# EAGLE board knxhome-lqfp32-v2 (EAGLE 9.4.0)
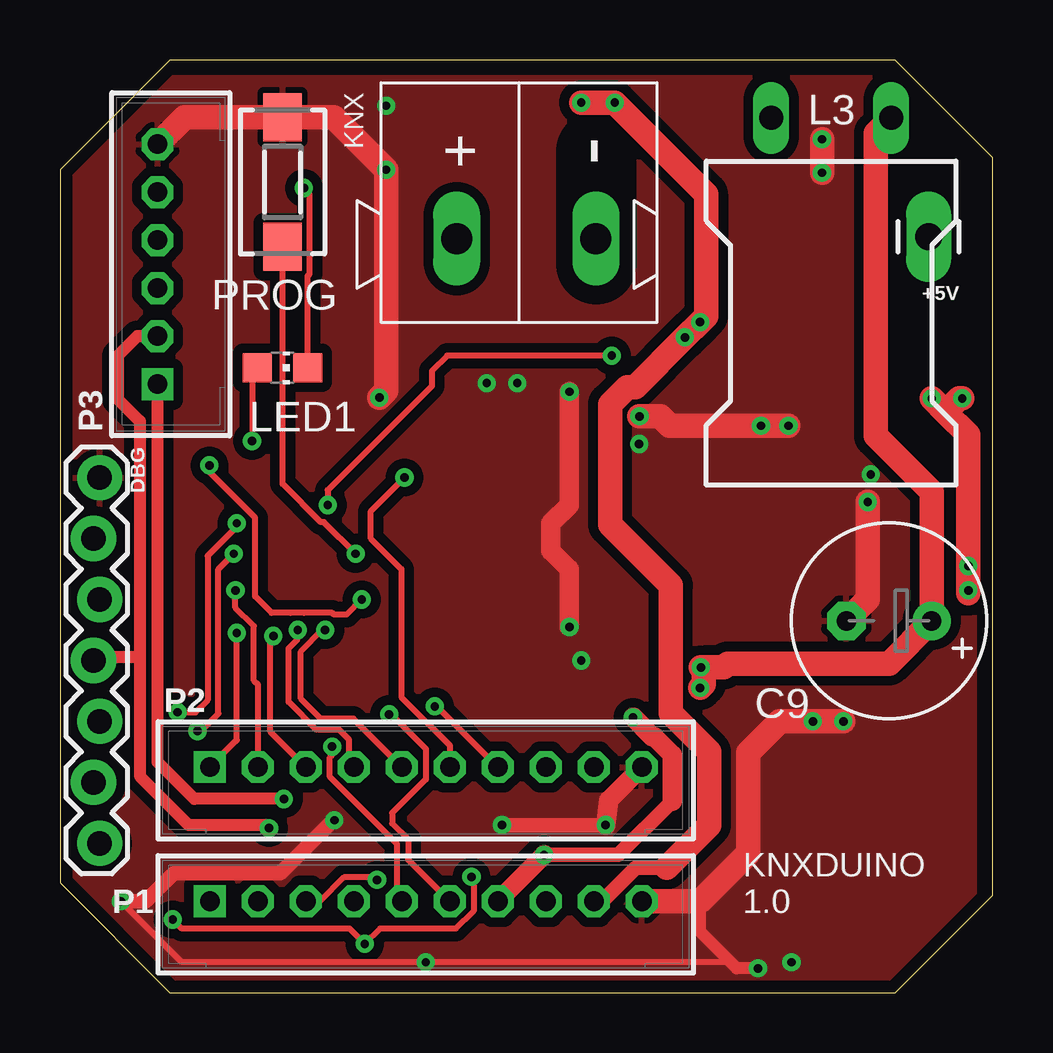
[diagram p0: board, top side]
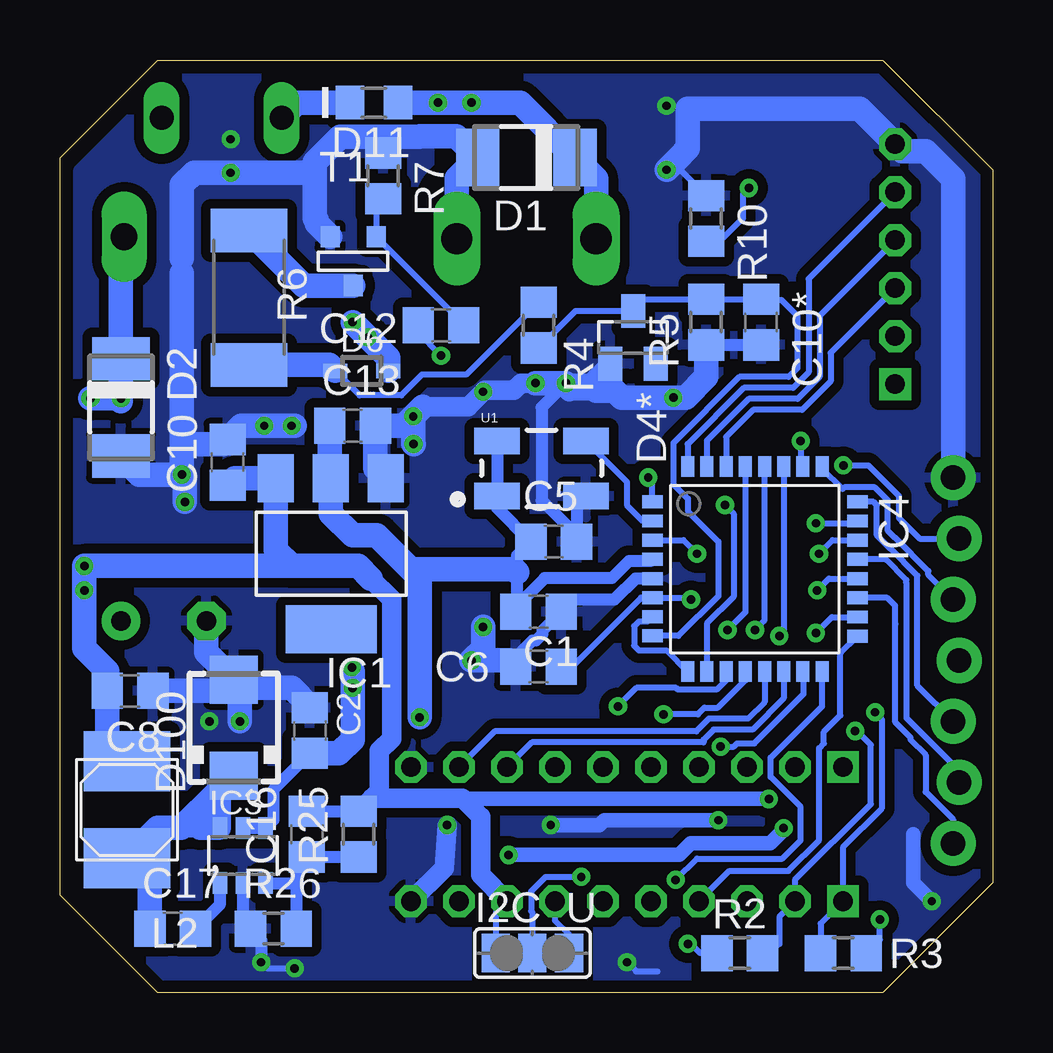
[diagram p1: board, bottom side, seen from below]

Size 38.86 x 38.86 mm. Coordinates in mm from the lower left corner, seen from the top.
Outline: 38.86,4.06 38.86,34.8 34.8,38.86 4.57,38.86 0,34.29 0,4.57 4.57,0 34.8,0 38.86,4.06
Copper layers (1*16): Top 0.035mm / dielectric 1.5mm / Bottom 0.035mm
Design rules "default *": minimum track width 8mil, minimum drill 0.35mm, track to track 8mil, track to pad 8mil, pad to pad 6mil, via to via 8mil, smd to smd 6mil, copper to edge 20mil, drill to drill 6mil, minimum pad ring 10mil, minimum via ring 8mil, stop-mask expansion 4mil, vias tented up to drill 40mil, thermal gap 10mil
Net classes: 1 power: width 0.305 mm
tRestrict: 1 lines
bRestrict: 3 lines

## Footprints (pad centres in the part's own frame; a part is rotated, then mirrored left to right if it is on the bottom)
1X01_LONGPAD = drill 1.118 pad 1.88 long: 1 0,0
C0805 = smd 1.3 x 1.5: 1 -0.95,0; 2 0.95,0
E3,5-8 = drill 0.813 pad 1.6: + -1.778,0 | drill 0.813 pad 1.6 octagon: - 1.778,0
DO-214AC = smd 1.8 x 2.4: A 2.025,0; C -2.025,0
SOT23 = smd 1 x 1.4: 1 -0.95,-1.1; 2 0.95,-1.1; 3 0,1.1
SOD323 = smd 1 x 0.6: 1 -1.1,0; 2 1.1,0
D0805 = smd 1.2 x 1.4: A 1,0; C -1,0
SMA = smd 2 x 2: A 2,0; C -2,0
1X07_LOCK = drill 1.016 pad 1.88: 1 0,0.127; 2 2.54,-0.127; 3 5.08,0.127; 4 7.62,-0.127; 5 10.16,0.127; 6 12.7,-0.127; 7 15.24,0.127
SJ_2 = smd 1.168 x 1.6: 1 -1.524,0; 2 0,0; 3 1.524,0
SOT223 = smd 1.499 x 2.007: 1 -2.261,-3.15; 2 0.025,-3.15; 3 2.311,-3.15 | smd 3.81 x 2.007: 4 0,3.15
SOT23-6 = smd 0.6 x 0.9: 1 -0.95,-1.15; 2 0,-1.15; 3 0.95,-1.15; 4 0.95,1.15; 5 0,1.15; 6 -0.95,1.15
LQFP32 = smd 0.54 x 0.85: 1 -2.8,-4.275; 2 -2,-4.275; 3 -1.2,-4.275; 4 -0.4,-4.275; 5 0.4,-4.275; 6 1.19,-4.275; 7 1.99,-4.275; 8 2.79,-4.275; 17 2.8,4.275; 18 2,4.275; 19 1.2,4.275; 20 0.4,4.275; 21 -0.4,4.275; 22 -1.2,4.275; 23 -2,4.275; 24 -2.8,4.275 | smd 0.85 x 0.54: 9 4.275,-2.8; 10 4.275,-2; 11 4.275,-1.2; 12 4.275,-0.4; 13 4.275,0.4; 14 4.275,1.2; 15 4.275,2; 16 4.275,2.8; 25 -4.275,2.8; 26 -4.275,2; 27 -4.275,1.2; 28 -4.275,0.4; 29 -4.275,-0.4; 30 -4.275,-1.2; 31 -4.275,-2; 32 -4.275,-2.8
WAGO-243-211 = drill 1.3 long: 1+ 0,2.65; 2- 0,-3.15
PIS2812 = smd 3.6 x 2.5: P$1 0,2.025; P$2 0,-2.025
BS11_LIEGEND = drill 1 long: 1 -2.5,0; 2 2.5,0
CHIP-LED0805 = smd 1.2 x 1.2: A 0,-1.05; C 0,1.05
B10B-PH-K = drill 0.813 square: 1 -9,0 | drill 0.813 octagon: 2 -7,0; 3 -5,0; 4 -3,0; 5 -1,0; 6 1,0; 7 3,0; 8 5,0; 9 7,0; 10 9,0
B6B-PH-K = drill 0.813 square: 1 -5,0 | drill 0.813 octagon: 2 -3,0; 3 -1,0; 4 1,0; 5 3,0; 6 5,0
DTSM-3 = smd 2 x 1.6: 1 -2.7,0; 2 2.7,0
R0805 = smd 1.3 x 1.5: 1 -0.95,0; 2 0.95,0
R2512 = smd 1.8 x 3.2: 1 -2.8,0; 2 2.8,0
SOT-23 = smd 0.787 x 0.889: 1 0.025,-1.016; 2 -0.94,1.016; 3 0.991,1.016
CRYSTAL-OSC-SMD-5X3 = smd 1.9 x 1.1: 1 -1.85,-1.15; 2 1.85,-1.15; 3 1.85,1.15; 4 -1.85,1.15
ROF-78EX-XSMD-R = smd 2.5 x 2.5: CTRL 0.91,12.57; GND 11.56,0.97; VIN 0.96,0.97; VOUT 11.56,12.57

## Placement (x,y rotation side)
+5V  [1X01_LONGPAD]  36.2,31.5 180 top
C1  100n  [C0805]  18.92,15.88 0 bottom
C2  4.7µF/50V  [C0805]  28.45,10.92 270 bottom
C5  [C0805]  18.29,18.8 0 bottom
C6  100n  [C0805]  18.92,13.59 180 bottom
C8  22µ/10V  [C0805]  35.94,12.57 180 bottom
C9  100uF 50V  [E3,5-8]  34.54,15.49 180 top
C10  1u  [C0805]  31.88,22.1 90 bottom
C10*  10p  [C0805]  9.65,27.94 270 bottom
C12  100n  [C0805]  22.99,27.81 0 bottom
C13  4u7  [C0805]  26.67,23.62 0 bottom
C16  270n  [C0805]  28.57,6.6 90 bottom
C17  15nF  [C0805]  34.16,2.67 0 bottom
D1  SMAJ40AC  [DO-214AC]  19.43,34.8 180 bottom
D2  SMAJ15CA  [DO-214AC]  36.32,24.38 270 bottom
D4*  3V3  [SOT23]  14.99,27.3 0 bottom
D6  400mA  [SOD323]  26.29,25.91 0 bottom
D11  TS4148  [D0805]  25.78,37.08 0 bottom
D100  MBRS1100  [SMA]  31.62,11.05 90 bottom
DBG  [1X07_LOCK]  1.52,21.46 270 top
I2C_U  [SJ_2]  19.18,1.65 0 bottom
IC1  LDL1117S33  [SOT223]  27.56,18.29 180 bottom
IC3  BD9G101  [SOT23-6]  31.24,5.71 0 bottom
IC4  STM32G071KBT6  [LQFP32]  9.91,17.65 270 bottom
KNX  WAGO-243-211  [WAGO-243-211]  19.18,31.42 90 top
L2  6.8µH  [PIS2812]  36.07,7.62 180 bottom
L3  150mH  [BS11_LIEGEND]  32.13,36.45 0 top
LED1  [CHIP-LED0805]  9.27,26.04 270 top
P1  B10B-PH-K  [B10B-PH-K]  15.24,3.81 0 top
P2  B10B-PH-K  [B10B-PH-K]  15.24,9.4 0 top
P3  B6B-PH-K  [B6B-PH-K]  4.06,30.35 90 top
PROG  DTSM-3  [DTSM-3]  9.27,33.78 90 top
R2  10k  [R0805]  10.54,1.65 180 bottom
R3  10k  [R0805]  6.22,1.65 0 bottom
R4  33k  [R0805]  18.92,27.81 90 bottom
R5  1k  [R0805]  11.94,27.94 90 bottom
R6  68R 1W  [R2512]  30.99,28.96 90 bottom
R7  10k  [R0805]  25.4,34.04 270 bottom
R10  510R  [R0805]  11.94,32.26 270 bottom
R25  2k4  [R0805]  26.42,6.6 90 bottom
R26  680R  [R0805]  29.97,2.67 0 bottom
T1  [SOT-23]  26.67,30.48 0 bottom
U1  OSCILLATOR5X3-PIN1-INDICATED  [CRYSTAL-OSC-SMD-5X3]  18.8,21.84 0 bottom
U$1  ROF-78E5.0-0.5SMD-R  [ROF-78EX-XSMD-R]  -24.13,-2.54 0 top  (outside the outline)

## Library data of the parts
+5V DBG = SparkFun-Connectors
C1 C2 C5 C6 C8 C10 C10* C12 C13 C16 C17 = rcl; SPICEPREFIX: C
C9 = rcl
D1 D2 D4* D11 = diode
D6 = zetex; MPN: CDSOD323-T05C; OC_FARNELL: 1824860; OC_NEWARK: 79R6078
D100 = diode; REICHELT: MBRS 1100 SMD
I2C_U = jumper
IC1 = burr-brown; MPN: REG1117; OC_FARNELL: 1097566; OC_NEWARK: 14P6981
IC3 L2 = Stefan_selfbus
IC4 = stm32g0
KNX = Connector_for_Selfbus-Projects
L3 = inductor-neosid
LED1 = led
P1-P3 = con-jst-ph
PROG = switch-tact
R2-R7 R10 R25 R26 = rcl; SPICEPREFIX: R
T1 = zetex; OC_FARNELL: unknown; OC_NEWARK: unknown
U1 = SparkFun-FreqCtrl
U$1 = rof-78e

## Nets
+3V3: C1.1 C5.1 C13.1 DBG.4 I2C_U.3 IC1.2 IC4.4 P1.7 P3.2 U1.1 U1.4
ADJ: C16.1 IC3.3 R25.1 R26.2
BTN: IC4.3 PROG.1
DRX: DBG.6 IC4.21
DTX: DBG.7 IC4.19
GND: C1.2 C2.1 C5.2 C6.2 C8.1 C9.- C10*.2 C10.2 C13.2 D1.A D2.A D4*.1 D100.A DBG.1 IC1.1 IC3.2 IC4.5 KNX.2- P1.10 P2.10 P3.6 PROG.2 R5.1 R7.1 R10.1 R26.1 T1.2 U1.2
I2C_PUP: I2C_U.2 R2.2 R3.2
I2C_SCL: IC4.22 P1.2 R2.1
I2C_SDA: IC4.23 P1.1 R3.1
I2CB_SCL: IC4.32 P3.5
I2CB_SDA: IC4.31 P3.4
IO_AN: IC4.12 P1.6
IO_DE: IC4.16 P1.3
IO_PA4: IC4.11 P2.7
IO_PA6: IC4.13 P2.9
IO_PA7: IC4.14 P2.8
IO_PA8: IC4.18 P2.1
IO_PB3: IC4.27 P2.3
IO_PB4: IC4.28 P2.4
IO_PB5: IC4.29 P2.5
IO_PB9: IC4.1 P2.6
IO_PC6: IC4.20 P2.2
IO_RX: IC4.15 P1.5
IO_TX: IC4.17 P1.4
IOB_AUX: IC4.30 P3.3
KNX+ [power]: D1.C D6.2 D11.A KNX.1+ P1.9
KNX_DC: C2.2 C9.+ IC3.4 IC3.5 L3.2
KNX_RECT: D6.1 R4.2 R6.1
KNX_RX_AN: C10*.1 D4*.3 IC4.8 R4.1 R5.2
KNX_TX: C12.1 IC4.10
LED: IC4.26 LED1.A
LX: C17.1 D100.C IC3.6 L2.P$1
N$1: D11.C L3.1
N$2: LED1.C R10.2
N$5: IC4.7 IC4.9
N$7: R6.2 T1.1
N$8: C12.2 R7.2 T1.3
N$19: C17.2 IC3.1
NRST: C6.1 DBG.2 IC4.6
OSC: IC4.2 U1.3
SWCLK: DBG.3 IC4.25
SWDIO: DBG.5 IC4.24
VCC: +5V.1 C8.2 C10.1 C16.2 D2.C I2C_U.1 IC1.3 L2.P$2 P1.8 P3.1 R25.2

## Tracks (layer width: path | path; a pad name or v marks a point on that pad's centre or on a via)
+3V3  (via drill 0.35)
  Top 0.508: DBG.4 1.52,13.97 3.28,13.97 3.33,14.02 | 3.33,14.02 3.33,23.81 2.41,24.73 2.41,26.54 3.22,27.35 P3.2 | 3.33,14.02 3.33,9.02 5.36,6.99 8.58,6.99 v8.71,6.86
  Top 0.61: 25.51,7.98 23.27,5.74 v20.17,5.74
  Top 0.813: P1.7 v20.17,5.74 | v23.88,11.47 24.68,10.67 24.77,10.67 25.51,9.92 25.51,7.98
  Bottom 0.254: P1.7 18.24,3 17.65,2.41 I2C_U.3
  Bottom 0.508: U1.4 U1.1 20.65,20.2 C5.1 19.81,18.22 19.81,17.53 19.81,15.94 C1.1 19.87,16.07 18.67,17.27 15.87,17.27 15.16,17.98 14.25,17.98 IC4.4
  Bottom 0.61: v20.17,5.74 13.07,5.74 12.58,6.22 9.27,6.22 8.71,6.79 v8.71,6.86
  Bottom 1.016: C13.1 27.62,21.47 IC1.2 27.58,19.96 26.67,19.05 25.65,19.05 24.26,17.65 | 24.26,17.65 23.88,17.27 v23.88,11.47 | 24.26,17.65 19.94,17.65 19.81,17.53
ADJ
  Bottom 0.508: R25.1 C16.1 29.02,5.21 29.02,4.45 | 29.02,4.45 R26.2 | IC3.3 29.14,4.57 29.02,4.45
BTN  (via drill 0.35)
  Top 0.254: PROG.1 9.27,21.2 10.86,19.61 10.99,19.61 v12.32,18.29
  Bottom 0.254: IC4.3 12.88,18.85 v12.32,18.29
DRX
  Bottom 0.254: DBG.6 1.4,9.25 3.6,11.45 3.6,16.51 3.6,17.06 3.6,17.18 4.46,18.05 IC4.21
DTX
  Bottom 0.254: DBG.7 1.65,7.22 2.79,8.36 2.79,9.91 3.43,10.54 3.43,10.64 4.01,11.22 4.05,11.26 4.05,15.36 4.06,15.37 4.06,16.13 4.39,16.45 IC4.19
GND  (via drill 0.35)
  Top 0.254: 27.94,1.27 v15.24,1.27 5.08,1.27 v2.54,3.81
  Top 0.508: v29.08,1.02 28.19,1.02 27.94,1.27 26.67,2.54 26.67,3.81
  Top 0.61: v22.73,6.99 v18.41,6.99 | v2.54,3.81 3.57,3.81 4.74,4.98 9.17,4.98 11.38,7.18 v11.43,7.18
  Top 0.813: P2.10 22.86,8.02 v22.73,6.99 | v21.23,25.04 21.21,20.32 20.45,19.56 20.45,18.41 21.23,17.63 v21.23,15.24
  Top 1.016: v33.66,20.45 33.66,16.38 C9.- | P1.10 26.67,3.81 28.68,5.82 28.68,9.99 29.99,11.3 v31.37,11.3 v32.64,11.3 | P3.6 5.19,36.48 PROG.2 11.4,36.48 v13.59,34.29 13.59,25.08 v13.31,24.79 | v24.14,24.02 25.01,24.02 25.4,23.62 v29.21,23.62 v30.35,23.62 | v31.75,34.16 v31.75,35.56
  Bottom 0.254: v15.24,1.27 14.86,0.89 13.97,0.89 | v30.48,1.27 30.23,1.02 v29.08,1.02 | R10.1 13.14,34.41 13.14,34.73
  Bottom 0.508: IC3.2 31.24,2.99 R26.1 30.48,2.23 v30.48,1.27 | R5.1 C10*.2 | IC4.5 14.88,17.25 15.75,16.38 17.46,16.38 C1.2 18.77,15.08 18.77,14.94 19.03,14.67 19.18,14.67 19.87,13.97 C6.2 | U1.2 17.34,20.3 17.34,19.05 | 17.34,19.05 C5.2 | v17.78,25.4 18.8,24.38 18.8,20.51 17.34,19.05
  Bottom 0.61: v18.41,6.99 16.38,6.99 16.18,7.18 v11.43,7.18 | v2.54,3.81 3.3,4.57 3.3,6.6
  Bottom 0.813: v19.05,25.4 19.65,25.4 19.95,25.09 21.17,25.09 v21.23,25.04 21.86,24.41 23.75,24.41 | P1.10 22.86,5.19 v22.73,6.99 | D4*.1 16.51,25.63 16.51,25.08 | 16.51,25.08 17.68,25.08 | 17.65,25.05 17.68,25.08 | 17.68,25.08 17.69,25.08 | 16.51,25.08 16.83,25.4 v17.78,25.4
  Bottom 1.016: KNX.2- 22.33,33.93 D1.A 22.34,35.69 23.87,35.69 23.89,35.67 25.4,35.67 | 25.4,35.67 27.19,35.67 28.26,34.61 28.26,34.16 | R7.1 25.4,35.67 | T1.2 28.17,32.05 28.17,32.19 28.26,32.28 28.26,34.16 | 33.78,29.97 33.78,22.86 | 33.78,30.61 33.78,33.66 33.27,34.16 v31.75,34.16 28.26,34.16 | C8.1 32.1,12.57 D100.A | D100.A 31.27,12.7 29.21,12.7 28.45,11.94 C2.1 | D100.A 32.77,14.19 C9.- | 33.78,22.86 v33.78,21.59 | 33.78,22.86 32.06,22.86 C10.2 31.3,23.62 v30.35,23.62 v29.21,23.62 29.08,23.62 | IC1.1 25.72,21.86 C13.2 24.54,23.62 v24.14,24.02 | v31.37,11.3 31.37,12.79 D100.A | DBG.1 1.65,33.91 2.79,35.05 3.76,35.05 P3.6 5.54,36.83 12.7,36.83 12.7,35.18 13.14,34.73 v13.59,34.29 | v24.14,24.02 23.75,24.41 | 16.51,25.08 15.75,25.08 15.47,24.79 v13.31,24.79 12.8,24.79 11.94,25.65 R5.1 | v19.05,25.4 v17.78,25.4 | C6.2 20.13,13.84 v21.72,13.84 21.23,14.33 21.23,14.82 21.23,14.83 v21.23,15.24 | v24.14,24.02 24.14,22.87 v24.13,22.86 | v33.66,20.45 33.66,21.46 v33.78,21.59 | D2.A 35.55,21.59 v33.78,21.59
  other vias: 13.59,36.96
  pour Top (isolate 0.406): 0,34.29 0,5.08 5.08,0 34.29,0 38.1,3.81 38.1,5.08 38.1,34.29 34.29,38.1 5.08,38.1 3.81,38.1
  pour Bottom (isolate 0.406): 0,34.29 0,5.08 5.08,0 34.29,0 38.1,3.81 38.1,34.29 34.29,38.1 5.08,38.1 3.81,38.1
I2C_PUP  (via drill 0.35)
  Top 0.254: v4.7,3.05 5.08,2.67 12.06,2.67 v12.7,2.03 13.34,2.67 16.5,2.67 17.23,3.4 17.23,4.74 v17.14,4.83
  Bottom 0.254: R3.2 4.7,2.23 v4.7,3.05 | I2C_U.2 19.18,3.35 19.23,3.4 19.23,4.22 18.62,4.83 v17.14,4.83 | R2.2 12.19,1.65 12.57,2.03 v12.7,2.03
I2C_SCL  (via drill 0.35)
  Top 0.254: v7.24,18.29 6.6,17.65 6.6,11.62 5.88,10.9 v5.73,10.9
  Bottom 0.254: R2.1 9.27,1.65 8.89,2.03 8.89,3.16 P1.2 8.24,4.7 5.08,7.86 5.08,10.33 5.66,10.9 v5.73,10.9 | v7.24,18.29 6.67,18.85 IC4.22
I2C_SDA  (via drill 0.35)
  Top 0.254: v7.37,19.56 7.37,19.42 6.15,18.2 6.15,12.2 5.64,11.68 v4.9,11.68
  Bottom 0.254: R3.1 7.17,2.88 P1.1 6.24,6.05 4.62,7.67 4.62,11.41 v4.9,11.68 | v7.37,19.56 5.73,19.56 IC4.23
I2CB_SCL
  Bottom 0.254: P3.5 7.67,29.75 7.67,25.85 8.32,25.2 10.36,25.2 12.71,22.85 IC4.32
I2CB_SDA
  Bottom 0.254: P3.4 7.21,28.2 7.21,25.66 8.13,24.74 10.17,24.74 11.91,23.01 IC4.31
IO_AN  (via drill 0.35)
  Top 0.254: P1.6 14.5,5.55 14.5,6.38 13.84,7.04 13.84,7.49 15.24,8.89 15.24,10.16 13.8,11.6 v13.72,11.6
  Bottom 0.254: IC4.12 10.31,13.02 11.45,11.88 12.01,11.88 12.29,11.6 v13.72,11.6
IO_DE  (via drill 0.35)
  Top 0.254: v13.21,4.7 13.11,4.8 11.83,4.8 10.84,3.81 P1.3
  Bottom 0.254: v13.21,4.7 12.32,5.59 8.76,5.59 8,6.35 8,7.75 9.24,8.99 9.25,8.99 9.25,9.79 7.11,11.93 IC4.16
IO_PA4  (via drill 0.35)
  Top 0.254: 18.16,9.48 P2.7 15.71,11.93 v15.61,11.93
  Bottom 0.254: IC4.11 11.11,13.02 11.5,12.62 13.11,12.62 13.19,12.7 14.85,12.7 v15.61,11.93
IO_PA6
  Bottom 0.254: IC4.13 9.51,12.11 10.2,11.42 11.82,11.42 12.35,10.89 20.75,10.89 P2.9
IO_PA7
  Bottom 0.254: IC4.14 8.71,12.26 10.01,10.96 11.63,10.96 12.05,10.55 12.05,10.43 19.2,10.43 P2.8
IO_PA8  (via drill 0.35)
  Top 0.254: P2.1 7.31,10.47 7.37,10.52 v7.37,14.99
  Bottom 0.254: v7.37,14.99 6.7,15.65 IC4.18
IO_PB3  (via drill 0.35)
  Top 0.254: P2.3 8.76,10.88 8.76,14.73 v8.89,14.86
  Bottom 0.254: v8.89,14.86 8.71,15.04 IC4.27
IO_PB4  (via drill 0.35)
  Top 0.254: P2.4 12.05,9.59 12.05,10.55 11.63,10.96 10.68,10.96 9.53,12.11 9.53,14.35 9.91,14.73 v9.91,15.11
  Bottom 0.254: v9.91,15.11 9.53,15.49 9.53,21.91 IC4.28
IO_PB5  (via drill 0.35)
  Top 0.254: P2.5 12.22,11.42 10.87,11.42 10.03,12.25 10.03,14.21 10.93,15.11 v11.05,15.11
  Bottom 0.254: IC4.29 10.31,15.86 v11.05,15.11
IO_PB9  (via drill 0.35)
  Top 0.254: v14.35,21.46 12.95,20.07 12.95,18.92 14.22,17.65 14.22,12.32 16.24,10.3 P2.6
  Bottom 0.254: IC4.1 14.18,21.29 v14.35,21.46
IO_PC6  (via drill 0.35)
  Top 0.254: P2.2 8.24,12.84 8.07,13.01 8.07,15.28 7.31,16.04 v7.31,16.76
  Bottom 0.254: 5.74,17.14 IC4.20 6.82,17.25 v7.31,16.76
IO_RX  (via drill 0.35)
  Top 0.254: v11.34,10.25 11.34,9.9 11.25,9.81 11.25,8.99 14.04,6.19 14.04,4.01 P1.5
  Bottom 0.254: v11.34,10.25 10.79,10.25 10.65,10.39 9.93,10.39 7.87,12.45 7.87,13.35 IC4.15
IO_TX
  Bottom 0.254: P1.4 10.97,5.08 8.51,5.08 7.23,6.36 7.23,10.2 7.04,10.39 7.04,10.87 6.35,11.56 6.35,14.13 IC4.17
IOB_AUX
  Bottom 0.254: P3.3 6.76,26.66 6.76,25.47 7.94,24.28 9.98,24.28 11.11,23.16 IC4.30
KNX+  (via drill 0.35)
  Top 0.61: P1.9 22.59,3.81 23.98,5.21 25.27,5.21
  Top 1.016: 25.27,5.21 27.05,6.99 27.05,10.03 25.45,11.63 25.45,16.97 22.92,19.5 22.92,24.52 23.64,25.23 23.96,25.23 v26.04,27.3 v26.67,27.94 26.92,28.19 26.92,33.27 v23.11,37.08 v21.72,37.08
  Bottom 1.016: D11.A v23.11,37.08 v21.72,37.08 19.69,37.08 D1.C 16.53,33.92 KNX.1+ | D6.2 25.19,26.46 v26.04,27.3 v26.67,27.94
KNX_DC  (via drill 0.35)
  Top 1.016: L3.2 34,35.81 34,23.2 36.32,20.88 C9.+ 34.54,13.72 27.81,13.72 27.65,13.55 26.83,13.55 | 26.83,13.55 26.83,12.86 v26.67,12.7 | v26.7,13.55 26.83,13.55
  Bottom 0.508: C2.2 29.97,8.45 29.97,7.18 IC3.4 IC3.5
  Bottom 1.016: C2.2 27.24,9.97 26.67,10.54 v26.67,12.7 26.67,13.39 26.7,13.42
KNX_RECT
  Bottom 0.254: R4.2 21.94,25.75 23.78,25.75 24.64,24.89 26.37,24.89 D6.1
  Bottom 1.016: R6.1 27.64,26.16 D6.1
KNX_RX_AN
  Bottom 0.254: R4.1 17.38,28.41 D4*.3 14.5,28.89 R5.2 C10*.1 9.65,28.86 8.79,28.86 8.13,28.19 8.13,26.04 8.51,25.65 10.55,25.65 13.31,22.9 13.31,21.19 12.7,20.58 12.7,20.07 11.43,18.8 11.43,16.52 13.09,14.86 IC4.8
KNX_TX  (via drill 0.35)
  Top 0.254: v22.99,26.54 16.13,26.54 15.49,25.91 15.49,25.27 11.16,20.93 v11.16,20.32
  Bottom 0.254: v22.99,26.54 23.94,27.49 C12.1 | 12.01,13.48 IC4.10 11.91,15.38 10.79,16.5 10.79,19.96 v11.16,20.32
LED  (via drill 0.35)
  Top 0.254: LED1.A 8,25.82 v8,22.99
  Bottom 0.254: v8,22.99 8,22.02 IC4.26
LX
  Bottom 0.813: 33.02,6.87 34.29,6.87 | IC3.6 32.25,6.87
  Bottom 1.016: C17.1 35.11,6.15 35.31,6.35 L2.P$1 34.8,6.87 34.29,6.87 33.81,6.87 32.25,8.42 | 33.02,6.87 32.25,6.87 32.25,8.42 | D100.C 32.25,8.42
N$1
  Bottom 1.016: L3.1 29,37.08 D11.C
N$2  (via drill 0.35)
  Top 0.254: LED1.C 10.32,29.86 10.4,29.95 10.4,33.29 v10.16,33.53
  Bottom 0.254: v10.16,33.53 10.41,33.27 10.41,32.26 11.36,31.31 R10.2
N$5
  Bottom 0.254: IC4.7 14.38,15.46 14.74,15.46 14.94,15.27 14.94,14.46 14.74,14.26 13.59,14.26 IC4.9
N$7
  Bottom 1.016: T1.1 28.7,29.46 R6.2
N$8
  Bottom 0.254: R7.2 25.68,32.81 T1.3 22.04,27.85 C12.2
N$19
  Bottom 0.508: C17.2 32.19,3.69 IC3.1
NRST  (via drill 0.35)
  Top 0.254: v6.22,21.97 6.22,21.7 8.13,19.8 8.13,16.51 8.82,15.82 9.61,15.82 10.16,15.82 11.34,15.82 11.42,15.75 11.94,15.75 v12.57,16.38
  Bottom 0.254: C6.1 17.53,13.59 14.65,16.46 IC4.6 12.57,16.46 v12.57,16.38 | v6.22,21.97 5.18,21.97 3.91,20.7 3.91,19.79 3.05,18.92 DBG.2
OSC
  Bottom 0.254: U1.3 15.24,21.29 15.24,20.32 14.57,19.65 IC4.2
SWCLK
  Bottom 0.254: DBG.3 2.68,17.41 2.68,17.56 4.08,18.97 4.1,18.97 4.37,19.24 4.37,20.51 4.91,21.05 6.19,21.05 6.26,20.99 7.11,21.84 IC4.25
SWDIO
  Bottom 0.254: DBG.5 3.14,12.79 3.14,17.38 4.28,18.51 4.29,18.51 4.83,19.05 4.83,20.32 4.96,20.45 IC4.24
VCC  (via drill 0.35)
  Top 0.508: P3.1 4.06,9.61 5.6,8.07 v9.33,8.07
  Top 1.016: v36.32,24.77 36.89,24.19 | 36.89,24.19 37.85,23.24 v37.85,17.78 v37.85,16.76 37.85,16.64 | 36.89,24.19 37.47,24.77 v37.59,24.77
  Bottom 0.254: P1.8 20.7,3.35 I2C_U.1
  Bottom 0.508: C16.2 R25.2
  Bottom 0.61: v9.33,8.07 22.08,8.07 22.1,8.1
  Bottom 0.813: 25.91,17.26 25.04,16.39 25.04,10.59 25.55,10.08 25.55,8.42 25.88,8.1 | 25.88,8.1 R25.2 | P1.8 21.34,4.91 21.34,7.33 22.1,8.1 25.88,8.1
  Bottom 1.016: L2.P$2 36.89,10.47 C8.2 36.89,13.4 37.85,14.35 v37.85,16.76 v37.85,17.78 29.21,17.78 | 29.21,17.78 26.43,17.78 25.91,17.26 | C10.1 31.59,21.44 IC1.3 29.87,18.44 29.21,17.78 | +5V.1 36.32,31.37 D2.C v36.32,24.77 | 36.32,24.64 v36.32,24.77 | v36.32,24.77 v37.59,24.77

## Text on the board
tNames: KNXDUINO / 1.0
Document: Put more vias on / 3v power rails